# Altium PCB mars3_CON.PcbDoc
Units mm, origin at the board's own origin, x right, y up, seen from the top; angles counter-clockwise.
Board outline 95 x 37 mm, 2 copper layers (Top Layer, Bottom Layer); 13 components, 46 nets, 121 pads, 174 vias.
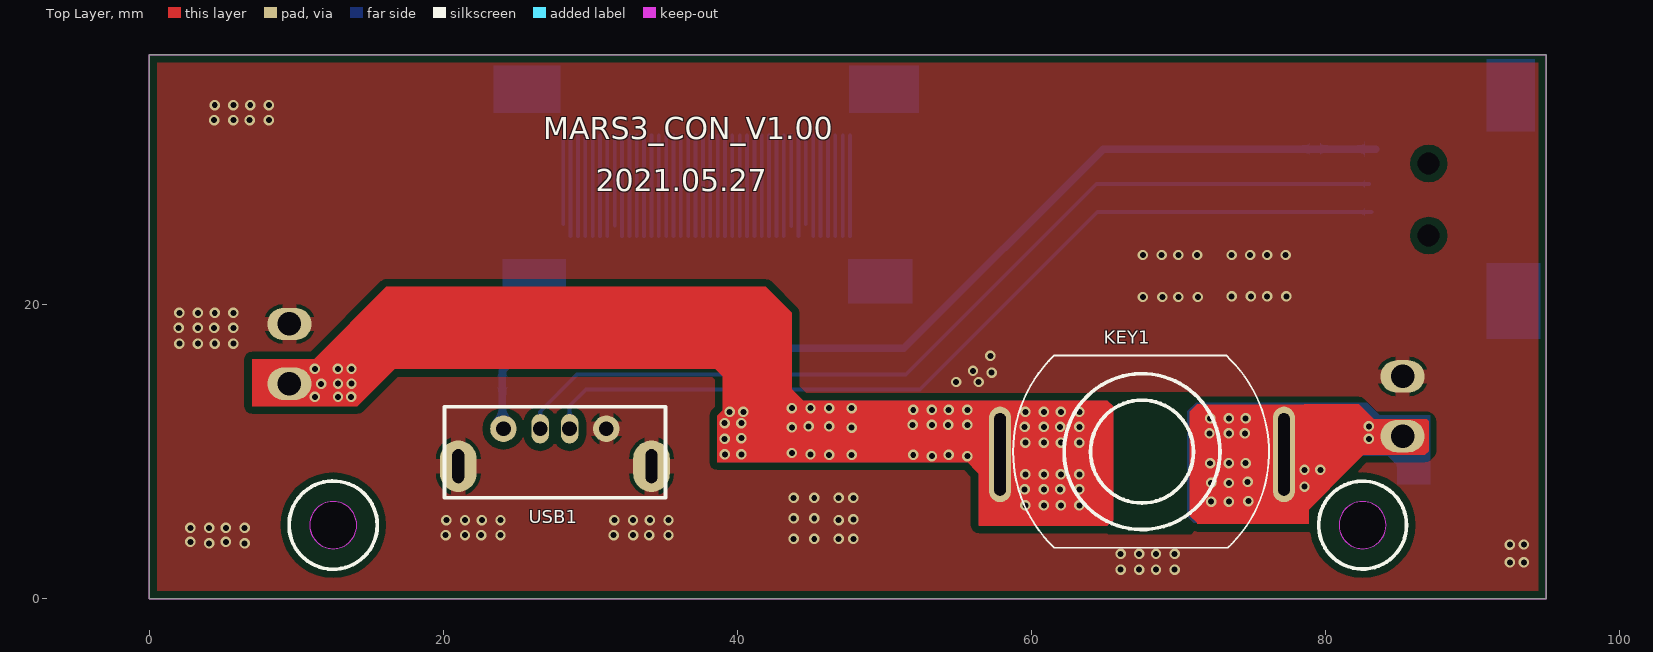
[diagram p0: Top Layer view]
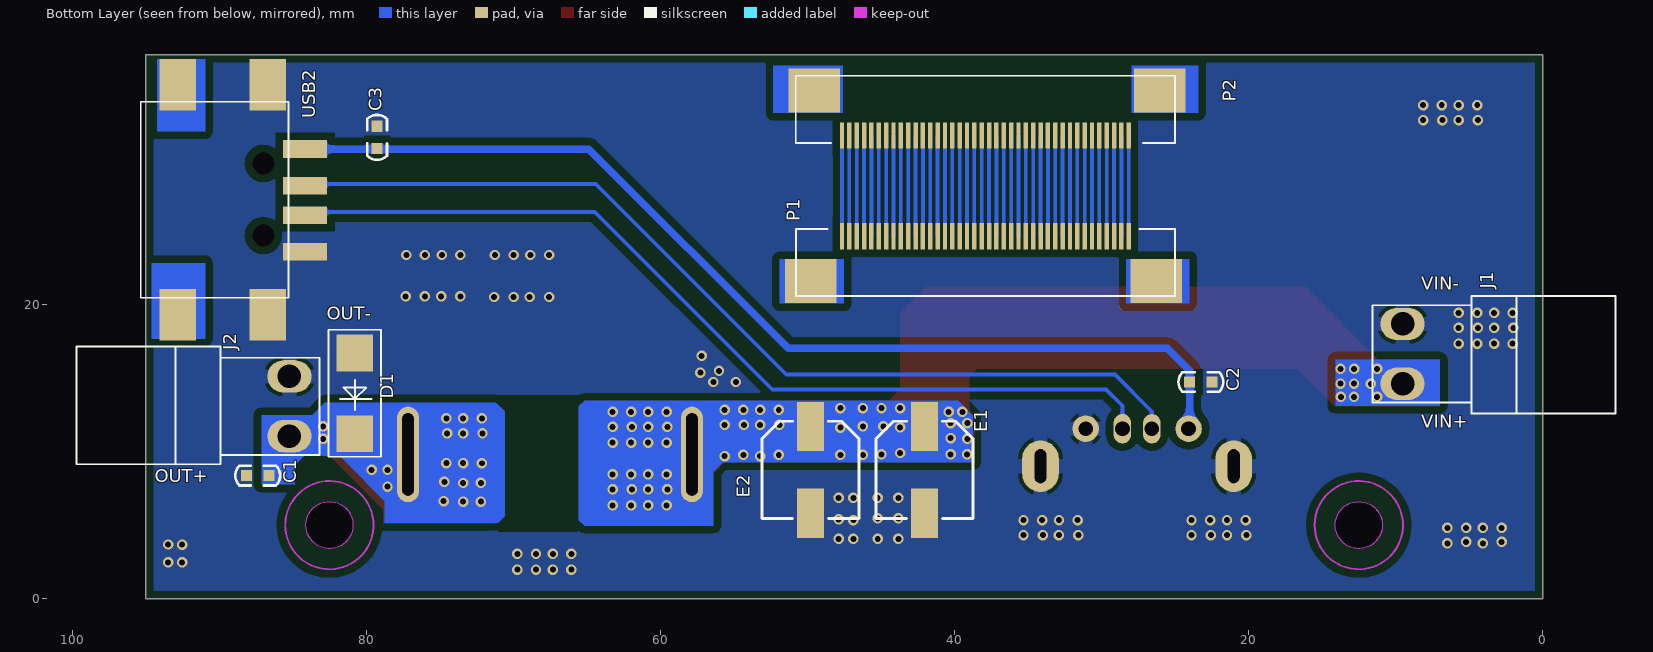
[diagram p1: Bottom Layer view, seen from below]

## Layer stack, top to bottom
Top Solder: solder mask 0.0102, Solder Resist, Dk 3.5
Top Layer: signal copper 0.0356
Dielectric 1: dielectric 0.32, FR-4, Dk 4.8
Bottom Layer: signal copper 0.0356
Bottom Solder: solder mask 0.0102, Solder Resist, Dk 3.5

## Board outline
0,0 0,37 95,37 95,0
cut-out: 10.9,5 ccw(c12.5,5) 12.5,3.4 ccw(c12.5,5) 14.1,5 ccw(c12.5,5) 12.5,6.6 ccw(c12.5,5)
cut-out: 80.9,5 ccw(c82.5,5) 82.5,3.4 ccw(c82.5,5) 84.1,5 ccw(c82.5,5) 82.5,6.6 ccw(c82.5,5)

## Design rules (kind name [scope] priority, off if disabled: settings)
Clearance Clearance_2 [InComponentClass('p1p2')] p1: gap=0.2 ignorepadtopadclearanceinfootprint=FALSE
Clearance Clearance_1 [InPolygon] p2: gap=0.508 ignorepadtopadclearanceinfootprint=FALSE
Clearance [All] p3: gap=0.508 ignorepadtopadclearanceinfootprint=FALSE
PolygonConnect PolygonConnect_1 [InComponentClass('jump')] p1: thpad.connectstyle=Relief thpad.reliefconductorwidth=1 thpad.reliefentries=4 thpad.polygonreliefangle="90 Angle" thpad.airgapwidth=0.254 smdpad.connectstyle=Relief smdpad.reliefconductorwidth=0.254 smdpad.reliefentries=4 smdpad.polygonreliefangle="90 Angle" smdpad.airgapwidth=0.254 via.connectstyle=Relief via.reliefconductorwidth=0.254 via.reliefentries=4 via.polygonreliefangle="90 Angle" via.airgapwidth=0.254
PolygonConnect [All] p2: connectstyle=Direct reliefconductorwidth=0.254 reliefentries=4 polygonreliefangle="90 Angle" airgapwidth=0.254
RoutingVias [All] p1: holewidth=0.711 width=1.27 viastyle="Through Hole" minholewidth=0.711 minwidth=1.27 maxholewidth=0.711 maxwidth=1.27
SolderMaskExpansion [All] p1: expansion=0.102
Width [All] p1: maxlimit=12.7 minlimit=0.254 preferedwidth=0.508
30 further rules are at their usual default settings.

## Classes and differential pairs
component class jump: J1 J2 USB1
pad class P1P2: P1-1 P1-2 P1-3 P1-4 P1-5 P1-6 P1-7 P1-8 P1-9 P1-10 P1-11 P1-12 P1-13 P1-14 P1-15 P1-16 P1-17 P1-18 P1-19 P1-20 P1-21 P1-22 P1-23 P1-24 P1-25 P1-26 P1-27 P1-28 P1-29 P1-30 P1-31 P1-32 P1-33 P1-34 P1-35 P1-36 P1-37 P1-38 P1-39 P1-40 P2-1 P2-2 P2-3 P2-4 P2-5 P2-6 P2-7 P2-8 P2-9 P2-10 P2-11 P2-12 P2-13 P2-14 P2-15 P2-16 P2-17 P2-18 P2-19 P2-20 P2-21 P2-22 P2-23 P2-24 P2-25 P2-26 P2-27 P2-28 P2-29 P2-30 P2-31 P2-32 P2-33 P2-34 P2-35 P2-36 P2-37 P2-38 P2-39 P2-40

## Components (designator, comment, footprint, x,y, rotation, side; value= is the part's Value field where it differs from the comment)
C1 "0.1UF" C0603 87.376,8.382 r180 bottom
C2 "104" C0603 23.24,14.722 r0 bottom
C3 "104" C0603 79.248,31.369 r270 bottom
D1 "SMBJ28A" DO214AA 80.772,13.97 r270 bottom
E1 "200UF 220V 10*8MM" CAPAE7766X80M 42.037,8.763 r270 bottom
E2 "200UF 220V 10*8MM" CAPAE7766X80M 49.784,8.763 r270 bottom
J1 "POWER" VH3.96_2P 4.826,12.584 r180 bottom locked
J2 "POWER" VH3.96_2P 89.916,17.145 r0 bottom
KEY1 "KEY" KEY 67.5,10 r180 top locked
P1 "FPC40P" FPC0.5_40PIN 24.997,20.574 r0 bottom
P2 "FPC40P" FPC0.5_40PIN 50.785,35.56 r180 bottom
USB1 "USB" USB_A_90_母座 27.575,11.684 r0 top locked
USB2 "USB" USB10_SMT 95.327,33.795 r270 bottom

## Footprints (in the part's own frame and the unit in brackets; to place one, negate y for a bottom-side part, rotate by r counter-clockwise, add the part's x,y. Pads: shape width x height; smd on the part's side, far side on the other; paste and mask are expansions set on the pad)
C0603 [mil]
  rect 30x30 smd: 1(-29.96,-0.41) 2(30.04,-0.41)
  silkscreen extent -60,-27 60,26, body extent -50,-20 53,20, height 35
CAPAE7766X80M [mm] "Aluminum Electrolytic Capacitor, Body 6.60x6.60x8.00mm, IPC Low Density"
  rect 3.35x1.85 smd: 1(-2.95,0) 2(2.95,0)
  silkscreen extent -3.3,-3.3 3.3,3.3, body extent -3.3,-3.3 3.3,3.3, height 8
DO214AA [mm]
  rect 2.5x2.5 smd: 1(-2.738,0) 2(2.762,0)
  silkscreen extent -4.32,-1.78 4.32,1.78
FPC0.5_40PIN [mm]
  rect 0.3x1.8 smd: 1(22.644,-4.064) 2(22.144,-4.064) 3(21.644,-4.064) 4(21.144,-4.064) 5(20.644,-4.064) 6(20.144,-4.064) 7(19.644,-4.064) 8(19.144,-4.064) 9(18.644,-4.064) 10(18.144,-4.064) 11(17.644,-4.064) 12(17.144,-4.064) 13(16.644,-4.064) 14(16.144,-4.064) 15(15.644,-4.064) 16(15.144,-4.064) 17(14.644,-4.064) 18(14.144,-4.064) 19(13.644,-4.064) 20(13.144,-4.064) 21(12.644,-4.064) 22(12.144,-4.064) 23(11.644,-4.064) 24(11.144,-4.064) 25(10.644,-4.064) 26(10.144,-4.064) 27(9.644,-4.064) 28(9.144,-4.064) 29(8.644,-4.064) 30(8.144,-4.064) 31(7.644,-4.064) 32(7.144,-4.064) 33(6.644,-4.064) 34(6.144,-4.064) 35(5.644,-4.064) 36(5.144,-4.064) 37(4.644,-4.064) 38(4.144,-4.064) 39(3.644,-4.064) 40(3.144,-4.064)
  rect 3.5x3 smd: ""(1.27,-1.016) ""(24.765,-1.016)
  silkscreen extent 0,-4.57 25.78,0
KEY [mm]
  oval 1.5x6.5 hole 0.8 slot 5.6 at 90 deg: 1(-9.652,0.19) 2(9.652,0.191)
  silkscreen extent -8.63,-6.54 8.76,6.54
USB10_SMT [mm]
  rect 1.2x3 smd: 1(3.215,11.176) 2(5.715,11.176) 3(7.715,11.176) 4(10.215,11.176)
  rect 3.5x2.5 smd: 5(14.478,8.636) 6(-1.143,8.636) ""(-1.143,2.509) ""(14.478,2.509)
  rect 3.5x2 smd: 5(14.478,8.636)
  round 1 hole 1.5: ""(4.204,8.332) ""(9.104,8.332)
  silkscreen extent 0,0 13.34,10.03
USB_A_90_母座 [mm]
  round 1.8 hole 1: 1(-3.5,-0.127) 4(3.5,-0.127)
  oval 1.2x2 hole 1: 2(-1,-0.127) 3(1,-0.127)
  oval 2.5x3.5 hole 0.8 slot 2.3 at 90 deg: 5(-6.57,-2.677) 6(6.57,-2.677)
  silkscreen extent -7.51,-4.83 7.52,1.37
VH3.96_2P [mm]
  oval 3x2.2 hole 1.6: 1(-4.699,2.032) 2(-4.699,6.096)
  silkscreen extent -6.73,0 9.78,8

## Part data
C1: library part CAP_10, "Capacitor"
C2 C3: library part Cap_1, "Capacitor", LatestRevisionDate=17-Jul-2002, LatestRevisionNote="Re-released for DXP Platform.", Published=8-Jun-2000, Publisher="Altium Limited"
D1: library part TVS
E1 E2: library part "CAPACITOR POL", "Capacitor"
J1 J2: library part VH3.96_2P
USB1 USB2: library part USB_Aĸͷ

## Free pads (board coordinates)
  round 1.5 hole 3.2: ""(12.5,5) ""(82.5,5)

## Via types
v1: diameter 0.711, hole 0.406, Top Layer to Bottom Layer, tented both sides, 174 vias

## Nets (pads, with @x,y where several pads share a name; then routed paths per layer and width w, separated by ;. In a path a pad name is that pad's centre, name@x,y a point inside that pad or via, vN(x,y) a via of type N, cw(c..) or ccw(c..) an arc to the next point about the centre after c; other vN are vias at no path point)
24V: E1.1 E2.1 J1.1 KEY1.2 | length 51.3
  Top Layer w0.254: J1.1 11.06,14.616 14.986,18.542 39.751,18.542 42.164,16.129 42.164,9.779
  Bottom Layer w0.254: 42.164,9.779 42.164,11.586 E1.1 E2.1
  other v1: 59.564,6.35 60.833,6.35 61.977,6.35 63.246,6.35 59.517,7.429 60.834,7.429 61.93,7.429 63.247,7.429 59.564,8.445 60.833,8.445 61.977,8.445 63.246,8.445 53.213,9.686 55.626,9.686 46.228,9.779 47.752,9.779 51.944,9.783 54.357,9.783 39.141,9.81 40.259,9.81 44.957,9.81 43.688,9.906 59.564,10.604 60.833,10.604 61.977,10.604 63.246,10.604 39.116,10.858 40.259,10.922 47.752,11.629 43.688,11.652 59.517,11.684 60.834,11.684 61.93,11.684 63.247,11.684 44.831,11.713 46.228,11.713 51.897,11.815 53.214,11.815 54.31,11.815 55.627,11.815 39.116,11.938 40.259,11.938 39.457,12.7 40.386,12.7 59.564,12.7 60.833,12.7 61.977,12.7 63.247,12.7 51.944,12.831 53.213,12.831 54.357,12.831 55.626,12.831 43.688,12.954 44.957,12.954 46.228,12.954 47.752,12.954 11.257,13.716 12.827,13.716 13.716,13.716 11.684,14.605 12.827,14.616 13.743,14.616 11.257,15.621 12.812,15.621 13.743,15.621
24V_OUT: C1.2 D1.2 J2.2 KEY1.1 | length 7.9
  Bottom Layer w0.254: KEY1.1 79.374,9.81 D1.2
  Bottom Layer w0.8: J2.2 85.217,9.08 85.926,8.372 C1.2
  other v1: 72.2,6.604 73.405,6.6 74.739,6.626 78.549,7.621 72.2,7.873 73.405,7.864 74.676,7.949 78.549,8.764 79.629,8.763 72.136,9.207 73.405,9.223 74.549,9.223 82.931,10.858 72.089,11.239 73.406,11.239 74.502,11.239 82.931,11.713 72.136,12.255 73.405,12.255 74.549,12.255
D+: USB1.3 USB2.3 | length 61.6
  Bottom Layer w0.254: USB1.3 28.575,13.112 29.687,14.224 52.387,14.224 64.453,26.289 USB2.3@83.112,26.289
D-: USB1.2 USB2.2 | length 64.1
  Bottom Layer w0.254: USB1.2@26.67,11.652 USB1.2 26.575,12.732 29.083,15.24 51.435,15.24 64.389,28.194 USB2.2@82.931,28.194
GND: C1.1 C2.1 C3.1 D1.1 E1.2 E2.2 J1.2 J2.1 USB1.4 USB1.5 USB1.6 USB2.4 USB2.5 USB2.6
  other v1: 66.04,1.968 67.309,1.968 68.453,1.968 69.722,1.968 92.519,2.467 93.472,2.467 66.04,3.048 67.309,3.048 68.453,3.048 69.722,3.048 92.519,3.67 93.472,3.683 4.063,3.76 6.476,3.76 2.794,3.857 5.207,3.857 43.815,4.064 45.212,4.064 46.863,4.064 47.879,4.064 20.146,4.318 21.463,4.318 22.559,4.318 23.876,4.318 31.571,4.318 32.888,4.318 33.984,4.318 35.301,4.318 2.794,4.809 4.063,4.809 5.207,4.809 6.476,4.809 20.193,5.334 21.462,5.334 22.606,5.334 23.875,5.334 31.618,5.334 32.887,5.334 34.031,5.334 35.3,5.334 46.863,5.334 47.879,5.398 43.815,5.461 45.212,5.461 43.815,6.858 45.212,6.858 46.863,6.858 47.879,6.858 54.864,14.732 56.388,14.732 57.277,15.367 56.007,15.494 57.194,16.51 2.032,17.335 3.301,17.335 4.445,17.335 5.714,17.335 1.985,18.415 3.302,18.415 4.398,18.415 5.715,18.415 2.032,19.431 3.301,19.431 4.445,19.431 5.714,19.431 67.564,20.513 68.881,20.513 69.977,20.513 71.294,20.513 73.59,20.561 74.907,20.561 76.003,20.561 77.32,20.561 67.564,23.368 68.833,23.368 69.977,23.368 71.246,23.368 73.59,23.368 74.859,23.368 76.003,23.368 77.272,23.368 4.398,32.541 5.715,32.541 6.811,32.541 8.128,32.541 4.445,33.557 5.714,33.557 6.858,33.557 8.127,33.557
NetP1_1: P1.1 P2.40 | length 6.9
  Bottom Layer w0.254: P1.1 P2.40
NetP1_2: P1.2 P2.39 | length 6.9
  Bottom Layer w0.254: P1.2 P2.39
NetP1_3: P1.3 P2.38 | length 6.9
  Bottom Layer w0.254: P1.3 P2.38
NetP1_4: P1.4 P2.37 | length 6.9
  Bottom Layer w0.254: P1.4 P2.37
NetP1_5: P1.5 P2.36 | length 6.9
  Bottom Layer w0.254: P1.5 P2.36
NetP1_6: P1.6 P2.35 | length 6.9
  Bottom Layer w0.254: P1.6 P2.35
NetP1_7: P1.7 P2.34 | length 6
  Bottom Layer w0.254: P1.7@44.641,25.464 P2.34
NetP1_8: P1.8 P2.33 | length 6.9
  Bottom Layer w0.254: P1.8 P2.33
NetP1_9: P1.9 P2.32 | length 6.2
  Bottom Layer w0.254: P1.9@43.641,25.32 P2.32
NetP1_10: P1.10 P2.31 | length 6.9
  Bottom Layer w0.254: P1.10 P2.31
NetP1_11: P1.11 P2.30 | length 6.9
  Bottom Layer w0.254: P1.11 P2.30
NetP1_12: P1.12 P2.29 | length 6.9
  Bottom Layer w0.254: P1.12 P2.29
NetP1_13: P1.13 P2.28 | length 6.9
  Bottom Layer w0.254: P1.13 P2.28
NetP1_14: P1.14 P2.27 | length 6.9
  Bottom Layer w0.254: P1.14 P2.27
NetP1_15: P1.15 P2.26 | length 6.9
  Bottom Layer w0.254: P1.15 P2.26
NetP1_16: P1.16 P2.25 | length 6.9
  Bottom Layer w0.254: P1.16 P2.25
NetP1_17: P1.17 P2.24 | length 6.9
  Bottom Layer w0.254: P1.17 P2.24
NetP1_18: P1.18 P2.23 | length 6.9
  Bottom Layer w0.254: P1.18 P2.23
NetP1_19: P1.19 P2.22 | length 6.9
  Bottom Layer w0.254: P1.19 P2.22
NetP1_20: P1.20 P2.21 | length 6.9
  Bottom Layer w0.254: P1.20 P2.21
NetP1_21: P1.21 P2.20 | length 6.9
  Bottom Layer w0.254: P1.21 P2.20
NetP1_22: P1.22 P2.19 | length 6.9
  Bottom Layer w0.254: P1.22 P2.19
NetP1_23: P1.23 P2.18 | length 6.9
  Bottom Layer w0.254: P1.23 P2.18
NetP1_24: P1.24 P2.17 | length 6.9
  Bottom Layer w0.254: P1.24 P2.17
NetP1_25: P1.25 P2.16 | length 6.9
  Bottom Layer w0.254: P1.25 P2.16
NetP1_26: P1.26 P2.15 | length 6.9
  Bottom Layer w0.254: P1.26 P2.15
NetP1_27: P1.27 P2.14 | length 6.9
  Bottom Layer w0.254: P1.27 P2.14
NetP1_28: P1.28 P2.13 | length 6.9
  Bottom Layer w0.254: P1.28 P2.13
NetP1_29: P1.29 P2.12 | length 6.9
  Bottom Layer w0.254: P1.29 P2.12
NetP1_30: P1.30 P2.11 | length 6.9
  Bottom Layer w0.254: P1.30 P2.11
NetP1_31: P1.31 P2.10 | length 6.9
  Bottom Layer w0.254: P1.31 P2.10
NetP1_32: P1.32 P2.9 | length 6.9
  Bottom Layer w0.254: P1.32 P2.9
NetP1_33: P1.33 P2.8 | length 6.1
  Bottom Layer w0.254: P1.33@31.641,25.382 P2.8
NetP1_34: P1.34 P2.7 | length 6.9
  Bottom Layer w0.254: P1.34 P2.7
NetP1_35: P1.35 P2.6 | length 6.9
  Bottom Layer w0.254: P1.35 P2.6
NetP1_36: P1.36 P2.5 | length 6.9
  Bottom Layer w0.254: P1.36 P2.5
NetP1_37: P1.37 P2.4 | length 6.9
  Bottom Layer w0.254: P1.37 P2.4
NetP1_38: P1.38 P2.3 | length 6.9
  Bottom Layer w0.254: P1.38 P2.3
NetP1_39: P1.39 P2.2 | length 6.9
  Bottom Layer w0.254: P1.39 P2.2
NetP1_40: P1.40 P2.1 | length 6
  Bottom Layer w0.254: P1.40@28.141,25.474 P2.1
VBUS: C2.2 C3.2 USB1.1 USB2.1 | length 69.6
  Bottom Layer w0.254: USB1.1@24.003,11.629 USB1.1
  Bottom Layer w0.5: USB1.1@24.003,11.629 C2.2 24.003,15.494 25.527,17.018 51.308,17.018 64.857,30.567 USB2.1@83.394,30.567
pads on no net: P1. P2. USB2.

## Polygon pours and split planes (outlines as drawn)
GND on Top Layer "Top Layer-GND" (solid, remove dead copper, pour order 2): -3.302,38.354 -3.302,-1.143 -3.429,-1.27 -2.54,-2.159 94.742,-2.159 97.536,0.635 97.536,38.354
GND on Bottom Layer "Bottom Layer-GND" (solid, remove dead copper, pour order 0): -2.413,38.989 -2.413,-1.651 95.123,-1.651 97.282,0.508 97.282,38.227 -1.397,38.227 -2.286,39.116

## Keep-outs
Keep-Out Layer:
  circle w0.127: c12.5,5 r3
  circle w0.127: c82.5,5 r3
  circle w0.05: c82.5,5 r1.6
  circle w0.05: c12.5,5 r1.6
  circle w0.05: c82.5,5 r1.6
  lines w0.05: 0,0 0,37 95,37 95,0 0,0

## Other copper
Top Layer:
  rectangle net 24V_OUT: 71.247,5.08 78.867,13.208
  rectangle net 24V: 6.985,13.081 13.589,16.287
  rectangle net 24V: 56.769,5 59.817,12.954
  rectangle net 24V: 43.434,9.271 64.516,13.462
  rectangle net 24V: 38.989,11.049 41.339,16.256
  rectangle net 24V: 39.624,9.271 43.688,13.462
  region net 24V_OUT: 78.549,13.208 82.236,13.208 83.389,12.055 83.389,11.303 78.994,11.303 78.486,11.811 78.486,12.954
  region net 24V: 43.18,14.605 43.306,14.605 44.957,12.954 44.957,11.957 44.177,11.957 42.418,13.716
  region net 24V_OUT: 77.851,12.196 86.868,12.195 86.995,12.069 86.995,10.037 86.741,9.783 82.55,9.783 77.978,5.21 77.978,12.069
  pour cut-out: 64.516,14.044 70.691,14.044 71.049,13.687 70.739,13.377 70.739,4.911 71.049,4.601 70.835,4.388 65.198,4.388 65.151,4.435 65.786,5.07 65.786,12.827 64.897,13.716 64.897,13.839 64.647,13.839 64.389,14.097
  region net 24V_OUT: 71.501,13.208 71.247,13.208 70.739,12.7 70.739,5.651 71.31,5.08 72.517,5.08 72.517,12.954
  region net 24V: 64.135,13.473 65.14,13.473 65.532,13.081 65.532,5.334 65.151,4.953 59.77,4.953 59.77,6.397 59.309,6.858 59.436,6.985 59.436,10.287 61.976,10.287
  region net 24V: 64.516,13.462
  region net 24V: 55.499,9.398 56.388,8.509 56.388,5 56.435,4.953 59.77,4.953 59.944,5.127 59.944,9.144 60.325,9.525 60.579,9.525 60.579,10.414 60.325,10.668 54.102,10.668
  region net 24V: 55.753,9.271
  region net 24V: 39.624,13.462 39.624,13.473 40.767,14.616 41.402,13.981 41.402,12.573 40.005,12.573 39.878,12.7
  region net 24V: 39.624,13.462 38.608,12.446 38.608,9.271 40.005,9.271 40.132,9.398 40.132,11.938
  region net 24V: 11.167,16.256 16.105,21.209 41.91,21.209 43.688,19.431 43.688,9.271 40.386,9.271 40.386,13.716 38.481,15.621 16.69,15.621 14.15,13.081 8.001,13.081 8.001,15.621 8.636,16.256
Bottom Layer:
  rectangle: 90.932,17.653 94.615,22.831
  rectangle: 90.932,31.764 94.234,36.703
  rectangle net 24V_OUT: 84.836,7.747 87.122,10.722
  rectangle: 47.565,33.02 52.324,36.244
  rectangle: 23.397,33.02 27.94,36.244
  rectangle net 24V_OUT: 78.486,12.255 82.033,13.335
  rectangle: 47.498,20.066 51.897,23.103
  rectangle: 24.003,20.066 28.321,23.114
  rectangle net 24V: 6.985,13.112 14.1,16.256
  rectangle net 24V_OUT: 71.628,5.143 78.74,13.335
  rectangle net 24V: 56.388,4.953 64.516,13.462
  rectangle net 24V_OUT: 81.285,9.686 87.126,12.48
  rectangle net 24V_OUT: 76.404,9.906 81.611,13.208
  rectangle net 24V: 50.419,10.414 57.912,13.462
  rectangle net 24V: 49.911,9.271 57.848,11.43
  rectangle net 24V: 40.457,9.271 50.038,13.462
  rectangle net 24V: 42.164,10.287 49.911,12.573
  rectangle net 24V: 41.141,9.271 42.957,12.827
  region net 24V_OUT: 83.918,10.033 85.442,8.509 86.741,8.509 86.741,10.033 86.487,10.287 83.058,10.287
  region net 24V_OUT: 81.391,13.335 82.811,13.335 83.978,12.167 83.978,11.713 80.99,11.713 80.961,11.684 80.961,12.915
  region net 24V_OUT: 82.033,13.335
  region net 24V_OUT: 72.484,13.335 71.183,13.335 70.58,12.732 70.58,5.62 71.025,5.175 77.268,5.175 82.815,10.722
  pour cut-out: 65.61,13.843 71.033,13.843 71.033,4.561 65.659,4.561 65.659,10.499 65.532,10.626 65.659,10.753 65.659,12.954 65.278,12.954 64.516,13.716 64.643,13.843 64.643,13.955
  region net 24V_OUT: 72.136,13.271
  region net 24V: 64.262,13.462 65.151,13.462 65.532,13.081 65.532,5.334 65.151,4.953 64.389,4.953 64.389,5.969 62.611,7.747
  region: 78.105,6.477
  region: 76.835,6.477
  region net 24V: 57.512,13.462 58.42,13.462 59.182,12.7 59.182,6.35 58.801,5.969 56.896,5.969 56.388,6.477 56.388,8.636 55.118,9.906 55.947,10.735 56.877,10.735
  region net 24V: 50.038,13.462 50.8,13.462 51.054,13.208 51.054,9.271 49.657,9.271 49.403,9.525 49.403,12.827
  region net 24V: 40.457,13.462 39.751,13.462 38.735,12.446 38.735,9.271 41.141,9.271 41.529,9.659 41.529,11.811
  region: 9.652,15.748

## Silkscreen, mask and mechanical layers (free items; w line width, h text height)
Top Overlay:
  circle w0.254: c82.5,5 r2.986
  circle w0.254: c12.5,5 r3
  text "MARS3_CON_V1.00" at 26.797,30.734 h2.54
  text "2021.05.27" at 30.353,27.178 h2.54
Bottom Overlay:
  text "VIN-" at 8.255,20.701 h1.52
  text "OUT-" at 82.677,18.669 h1.52
  text "VIN+" at 8.255,11.303 h1.52
  text "OUT+" at 94.361,7.621 h1.52